# Altium PCB PCB.PcbDoc
Units mm, origin at the board's own origin, x right, y up, seen from the top; angles counter-clockwise.
Board outline 36.7 x 74.05 mm, 2 copper layers (Top Layer, Bottom Layer); 22 components, 23 nets, 97 pads, 0 vias.
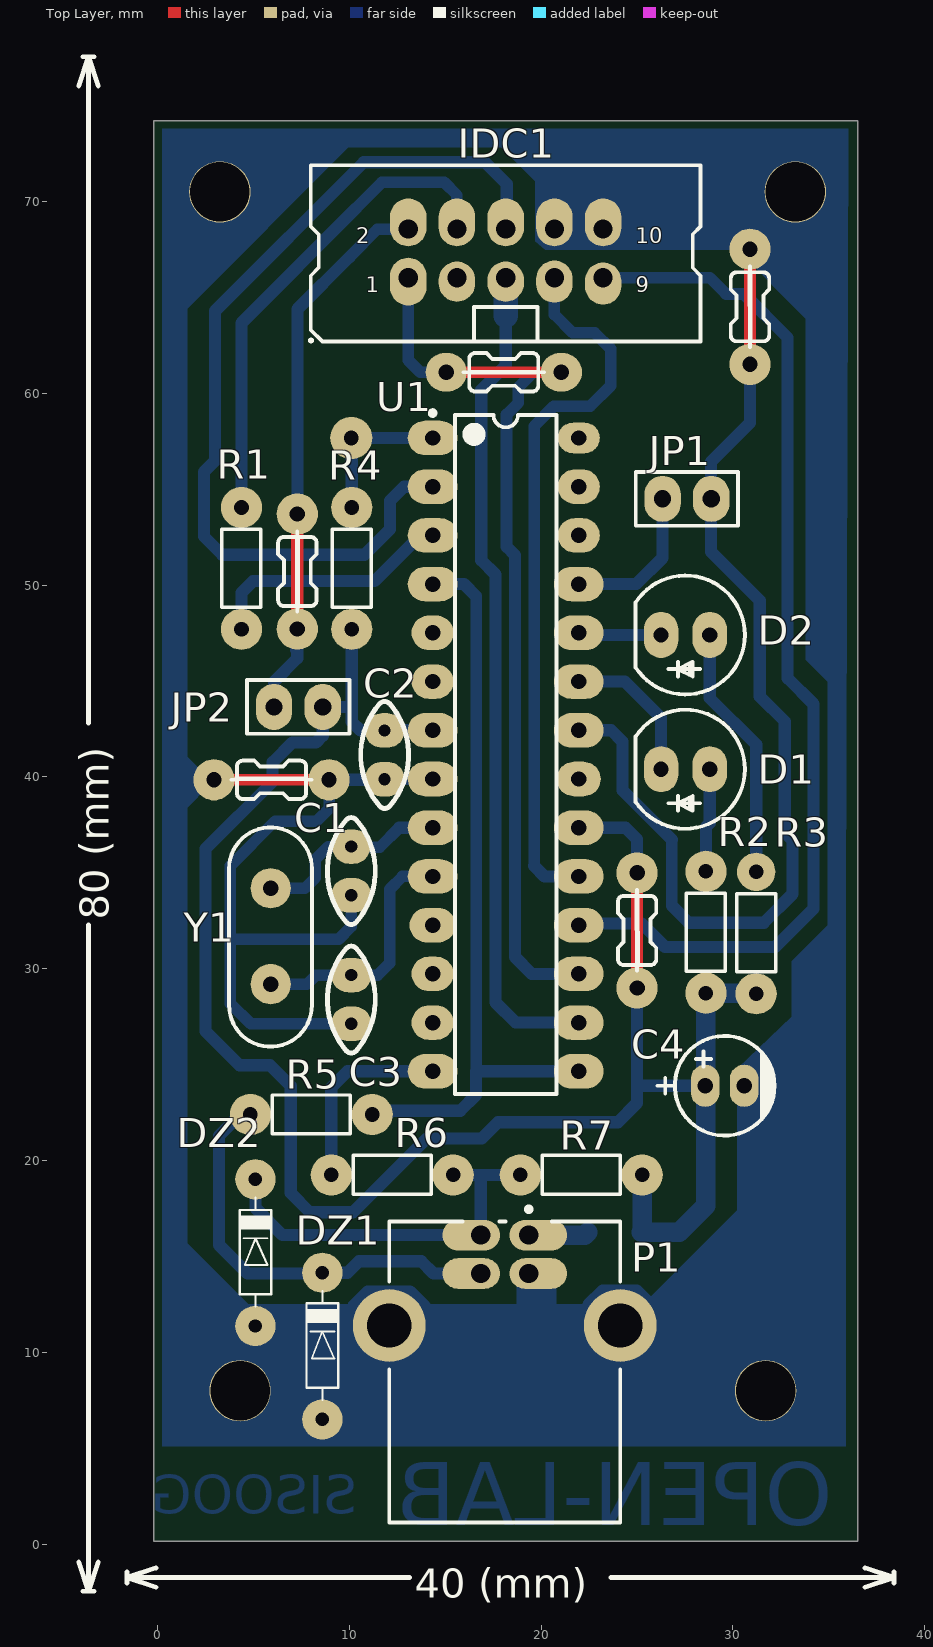
[diagram p0: Top Layer view]
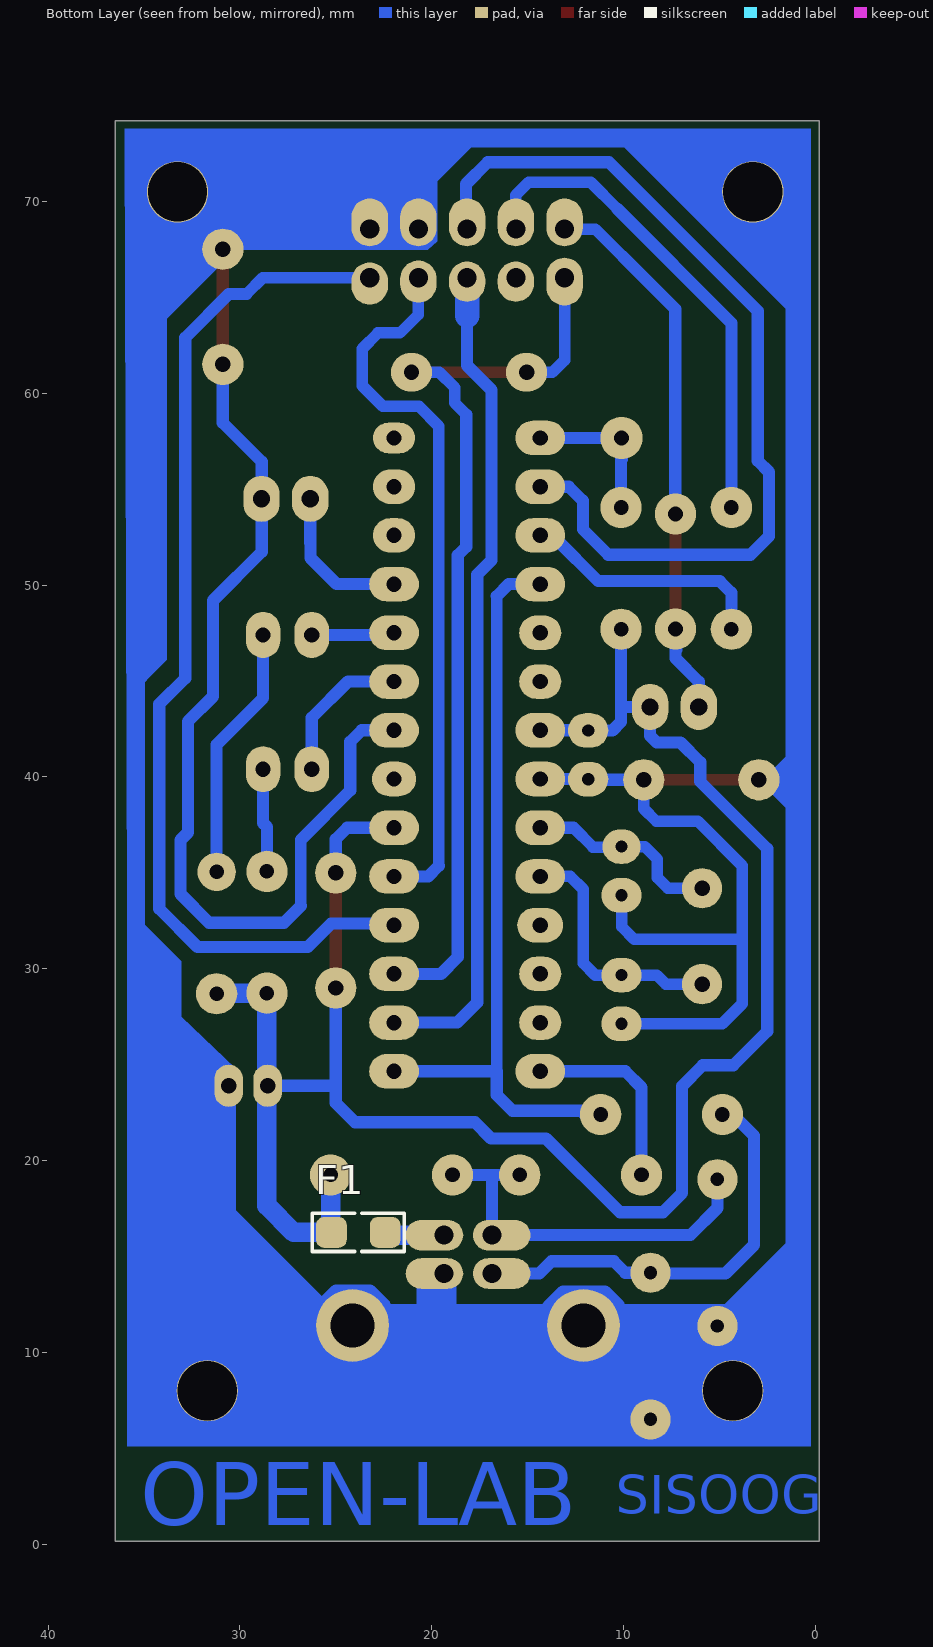
[diagram p1: Bottom Layer view, seen from below]
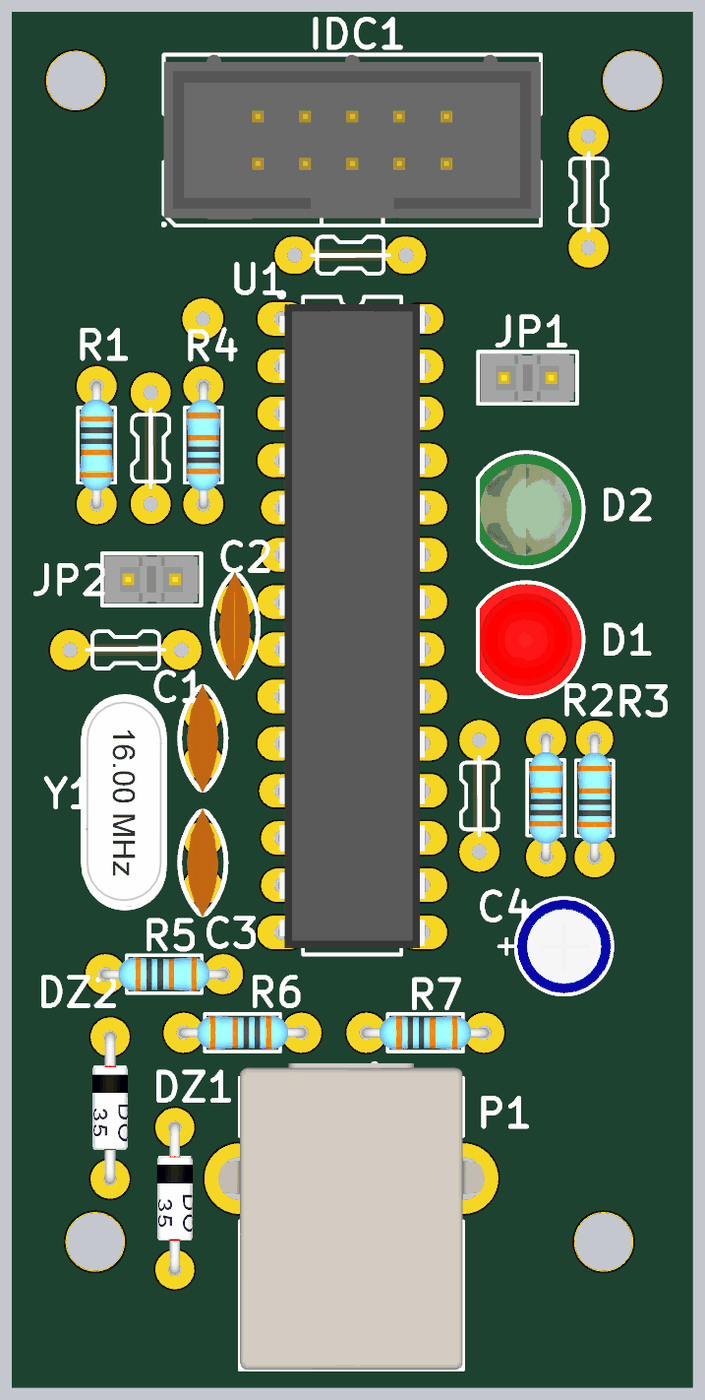
[diagram p2: 3D render of the assembled board from above, using the file's embedded part models]

## Layer stack, top to bottom
Top Solder: solder mask 0.0102, Solder Resist, Dk 3.5
Top Layer: signal copper 0.0356
Dielectric 1: dielectric 0.32, FR-4, Dk 4.8
Bottom Layer: signal copper 0.0356
Bottom Solder: solder mask 0.0102, Solder Resist, Dk 3.5

## Board outline
-0.2,0.15 36.5,0.15 36.5,74.2 -0.2,74.2

## Design rules (kind name [scope] priority, off if disabled: settings)
Clearance [All] p1: gap=0.35 ignorepadtopadclearanceinfootprint=FALSE
PolygonConnect [All] p1: connectstyle=Relief reliefconductorwidth=0.254 reliefentries=4 polygonreliefangle="90 Angle" airgapwidth=0.254
RoutingVias [All] p1: holewidth=0.711 width=1.27 viastyle="Through Hole" minholewidth=0.711 minwidth=1.27 maxholewidth=0.711 maxwidth=1.27
SolderMaskExpansion [All] p1: expansion=0.102
Width [All] p1: maxlimit=1.27 minlimit=0.6 preferedwidth=1.016 minimp=50.000000 maximp=50.000000 favimp=50.000000
30 further rules are at their usual default settings.

## Components (designator, comment, footprint, x,y, rotation, side; value= is the part's Value field where it differs from the comment)
C1 "22pF" "Cap - 100nF"#1 10.1,35.1 r270 top
C2 "100nF" "Cap - 100nF"#2 11.84,41.154 r270 top
C3 "22pF" "Cap - 100nF"#2 10.1,28.4 r270 top
C4 "100uF/16V" C_EL_5X7 29.566,23.901 r0 top
D1 "LED5MM_RED" LED5MM_RED 27.52,40.404 r180 top
D2 "LED5MM_GRN" LED5MM_GRN 27.52,47.404 r180 top
DZ1 "3V6" "DO 35" 8.59,10.329 r270 top
DZ2 "3V6" "DO 35" 5.1,15.2 r270 top
F1 "FUSE1.5A_1206" F1206 23.825,16.256 r0 bottom
IDC1 "CONNECTOR_IDC_5X2" IDC2.54-10PIN 18.15,67.295 r0 top
JP1 "Jumper" "Jumper Small - 2.54 - GRAY" 27.6,54.5 r180 top
JP2 "Jumper" "Jumper Small - 2.54 - GRAY" 7.34,43.654 r180 top
P1 "USB Connector" USB2.5-2H4E 19.352,16.114 r270 top
R1 "1K" Res-(1/4)#1 4.374,50.876 r270 top
R2 "1K" Res-(1/4)#1 28.59,31.904 r90 top
R3 "1K" Res-(1/4)#2 31.209,31.876 r90 top
R4 "10K" Res-(1/4)#1 10.124,50.876 r90 top
R5 "68" Res-(1/4)#1 8.015,22.404 r0 top
R6 "68" Res-(1/4)#1 12.235,19.252 r180 top
R7 "2K2" Res-(1/4)#1 22.09,19.252 r0 top
U1 "ATmega8A-PU" 28P3 18.15,41.164 r0 top
Y1 "12 MHz" "XTAL 16MHZ" 5.9,31.7 r270 top

## Footprints (in the part's own frame and the unit in brackets; to place one, negate y for a bottom-side part, rotate by r counter-clockwise, add the part's x,y. Pads: shape width x height; smd on the part's side, far side on the other; paste and mask are expansions set on the pad)
28P3 [mm] "DIP, 28-Leads, Row Spacing 7.62mm, Pitch 2.54mm, Body 34.67x7.3mm"
  oval 2.6x1.8 hole 0.8: 1(-3.81,16.51) 2(-3.81,13.97) 3(-3.81,11.43) 4(-3.81,8.89) 7(-3.81,1.27) 8(-3.81,-1.27) 9(-3.81,-3.81) 10(-3.81,-6.35) 14(-3.81,-16.51) 15(3.81,-16.51) 16(3.81,-13.97) 17(3.81,-11.43) 18(3.81,-8.89) 19(3.81,-6.35) 20(3.81,-3.81) 22(3.81,1.27) 23(3.81,3.81) 24(3.81,6.35) 25(3.81,8.89)
  oval 2.2x1.8 hole 0.8: 5(-3.81,6.35) 6(-3.81,3.81) 12(-3.81,-11.43) 13(-3.81,-13.97) 26(3.81,11.43) 27(3.81,13.97)
  oval 2.4x1.8 hole 0.8: 11(-3.81,-8.89)
  oval 2.3x1.8 hole 0.8: 21(3.81,-1.27)
  oval 2.2x1.6 hole 0.8: 28(3.81,16.51)
  silkscreen extent -3.93,-17.7 2.65,17.93, body extent -3.95,-17.35 3.95,17.3, height 5.04
C_EL_5X7 [mm] "Capacitor Electrolythic, D5.0X7.0H pitch: 2mm"
  oval 1.5x2.2 hole 0.8: 1(-1.016,0) 2(1.016,0)
  silkscreen extent -3.5,-2.6 2.6,2.6, body extent -2.53,-2.53 2.53,2.53, height 7.33
"Cap - 100nF"#1 [mm]
  oval 1.8x2 hole 0.635: 1(-1.27,0)
  oval 1.8x2.1 hole 0.635: 2(1.27,0)
  silkscreen extent -2.78,-1.25 2.79,1.25, body extent -2.92,-0.86 2.92,0.83, height 6.92
"Cap - 100nF"#2 [mm]
  oval 1.8x2.1 hole 0.635: 1(-1.27,0) 2(1.27,0)
  silkscreen extent -2.78,-1.25 2.79,1.25, body extent -2.92,-0.86 2.92,0.83, height 6.92
"DO 35" [mm] "Diode"
  round 2.1 hole 0.7: 1(3.825,0) 2(-3.825,0)
  silkscreen extent -2.88,-0.85 2.8,0.85, body extent -4.1,-0.96 4.08,0.96, height 2.46
F1206 [mm] "FUSE, 1206, 3.2x1.6mm"
  rrect50% 1.6x1.6 smd paste-2 mask+0.075: 1(-1.4,0) 2(1.4,0)
  Top Layer pour cut-out: -0.8,1 -0.8,-1 0.8,-1 0.8,1
  silkscreen extent -2.4,-1 2.4,1, body extent -1.6,-0.8 1.6,0.8, height 1
IDC2.54-10PIN [mm] "Connector; IDC, Low Profile Male Header, Thru-Hole; 10 Position; Vertical; Pitch 2.54 mm; 20.32 x 9.2 x 9.45 mm (LxWxH) DESIGNER : ABBAS BASEREH"
  oval 1.9x2.5 hole 1 copper offset 0,-0.2: 1(-5.08,-1.27)
  oval 1.9x2.5 hole 1 copper offset 0,0.35: 2(-5.08,1.27) 4(-2.54,1.27) 6(0,1.27) 8(2.54,1.27) 10(5.08,1.27)
  oval 1.9x2.1 hole 1 copper offset 0,-0.2: 3(-2.54,-1.27) 5(0,-1.27)
  oval 1.9x2.2 hole 1 copper offset 0,-0.2: 7(2.54,-1.27)
  oval 1.9x2.2 hole 1 copper offset 0,-0.3: 9(5.08,-1.27)
  silkscreen extent -10.16,-4.6 10.16,4.6, body extent -10.15,-4.25 10.15,4.6, height 9.17
"Jumper Small - 2.54 - GRAY" [mm]
  oval 1.9x2.4 hole 0.9: 1(-1.27,0) 2(1.27,0)
  silkscreen extent -2.67,-1.4 2.67,1.4, body extent -2.54,-1.27 2.54,1.27, height 8.57
LED5MM_GRN [mm] "LED THD 5MM GREEN"
  oval 1.8x2.4 hole 0.8: 1(-1.27,0) 2(1.27,0)
  silkscreen extent -3.1,-3.1 2.6,3.1, body extent -3,-3 2.5,3, height 9.14
LED5MM_RED [mm] "LED THD 5MM RED"
  oval 1.8x2.4 hole 0.8: 1(-1.27,0) 2(1.27,0)
  silkscreen extent -3.1,-3.1 2.6,3.1, body extent -3,-3 2.5,3, height 9.14
Res-(1/4)#1 [mm]
  round 2.15 hole 0.762: 1(-3.175,0) 2(3.175,0)
  silkscreen extent -2.03,-1.02 2.03,1.02, body extent -3.43,-0.93 3.43,0.91, height 2.92
Res-(1/4)#2 [mm]
  round 2.15 hole 0.762: 1(-3.175,0)
  round 2 hole 0.762: 2(3.175,0)
  silkscreen extent -2.03,-1.02 2.03,1.02, body extent -3.43,-0.93 3.43,0.91, height 2.92
USB2.5-2H4E [mm] "Connector; USB1.1, Type B, Thru-Hole; 4 Position; Right Angle"
  oval 1.6x3 hole 1 copper offset 0,0.5: 1(0,0) 4(2,0)
  oval 1.6x3 hole 1 copper offset 0,-0.5 paste+2: 2(0,-2.5)
  oval 1.6x3 hole 1 copper offset 0,-0.5: 3(2,-2.5)
  round 3.8 hole 2.3: 4(4.71,4.77) 4(4.71,-7.27)
  silkscreen extent -1.47,-7.27 14.99,4.77, body extent -1.5,-8.7 15,6.2, height 10.95
"XTAL 16MHZ" [mm] "Crystal Oscillator"
  round 2.1 hole 0.8: 1(-2.5,0) 2(2.5,0)
  silkscreen extent -5.67,-2.18 5.76,2.15, body extent -5.68,-2.38 5.67,2.27, height 0.99

## Part data
C1 C2 C3: library part Cap-Bipolar, "Bipolar Capacitor", Voltage=100V, Adding Date=1387/12/20, Designer="Saeid Jorablo", Organazation=ControTec
C4: library part CAP_THD_EL, "CAP, THD, ELEC,", =http://www.chila.ir, ASSEMBLY=ASSEMBLY, DESC=DESCRIPTION, DIST#=MOUSER, MANF=MANF, MANF_P#=MANF_PART#, PARAM=20%, PARAM2=25V, PRICE="10= 5$"
D1: library part LED_THD_5MM_RED, "LED, THD, 5MM, RED", =http://www.chila.ir, ASSEMBLY=ASSEMBLY, DESC=DESCRIPTION, MANF=MANF, MANF_P#=MANF_PART#, PARAM2=2.2V, PRICE=PRICE
D2: library part LED_THD_5MM_GRN, "LED, THD, 5MM, GREEN", =http://www.chila.ir, ASSEMBLY=ASSEMBLY, DESC=DESCRIPTION, MANF=MANF, MANF_P#=MANF_PART#, PARAM2=2.2V, PRICE=PRICE
DZ1 DZ2: library part "ZENER GENERAL DIODE", "DIODE ZENER GENERAL", ComponentLink1Description="Manufacturer Link", ComponentLink2Description=Datasheet, PackageDescription="DIODE GEN ZENER", PackageReference="DO 35", PackageVersion=2017-1-12, Published=2017-1-12, Publisher="Abbas Basereh"
F1: library part FUSE_3A_1206_SLOW, "Fuse, 3A, 32VDC, 1206, SMD, Slow Blow", =http://www.chila.ir, MANF=Bourns, MANF_P#=SF-1206SP300-2, PARAM="3A; 32VDC; Slow Blow", PARAM2=0.027Ohm, PRICE=0.9$
IDC1: library part "IDC 5X2", "IDC, 5-Pin, Dual row", Manufacturer=CHINA, Max Current=mA, Category=Connector, ComponentLink1Description=Datasheet, ComponentLink2Description=Reference, Connector type="IDC5X2  PROGPIN", Designer="ABBAS BASEREH", LatestRevisionDate=1395-11-17, Mounting Technology=Through-Hole, Pin Count=10, Publisher="ABBAS BASEREH", Status=Unreleased, Update=2017-2-4
P1: library part "USB B-Type", "USB Connector-B Type", Adding Date=10/26/2010
R1 R2 R3 R4 R5 R6 R7: library part Resistor, "Resistor"
U1: "8-bit AVR Microcontroller, 8KB Flash, 512 Bytes EEPROM, 1KB SRAM, 28-pin PDIP, Industrial Grade (-40°C to 85°C)", Supplier Part Number 1=ATMEGA8A-PU-ND, ComponentLink1Description="Manufacturer Link", ComponentLink1URL=http://www.atmel.com/products/avr/default.asp?, ComponentLink2Description="ATmega8A Datasheet", ComponentLink2URL=http://www.atmel.com/dyn/resources/prod_documents/doc8159.pdf, ComponentLink3Description="ATmega8A Summary", ComponentLink3URL=http://www.atmel.com/dyn/resources/prod_documents/8159S.pdf, ComponentLink4Description="Atmel.com Home", ComponentLink4URL=http://www.atmel.com, DatasheetVersion=2017-1-5, PackageDescription="28-lead (0.300\"/7.62mm Wide) Plastic Dual Inline Package (PDIP)", PackageReference=28P3, PackageVersion=2017-1-5, Published=2017-1-5, Publisher="Abbas Basereh", Supplier 1=Digi-Key, Supplier 2=Farnell, Supplier 3=Mouser, Supplier Part Number 2=1748534, Supplier Part Number 3=556-ATMEGA8A-PU
Y1: library part XTAL, "XTAL Crystal", ComponentLink1Description=Datasheet, ComponentLink2Description=Reference, Design Date=2017-1-3, Designer="ABBAS BASEREH", Mounting Technology="Surface Mount\Through-Hole", Status=Unreleased
JP1 JP2: Company=E.P.I.L, Defualt State=Close, Design Date=2011/11/02

## Free pads (board coordinates)
  round 2.15 hole 0.8: 1(7.286,47.713) 1(8.942,39.853) 1(25,29) 1(30.886,61.513) 2(2.942,39.853) 2(7.286,53.713) 2(25,35) 2(30.886,67.513)
  oval 2.15x2 hole 0.8: 1(15.05,61.1) 2(21.05,61.1)
  round 2.2 hole 0.762: 6(10.1,57.674)
  round 3.2 hole 3.1: D(3.25,70.5) D(4.3,8) D(31.7,8) D(33.25,70.5)

## Nets (pads, with @x,y where several pads share a name; then routed paths per layer and width w, separated by ;. In a path a pad name is that pad's centre, name@x,y a point inside that pad or via, vN(x,y) a via of type N, cw(c..) or ccw(c..) an arc to the next point about the centre after c; other vN are vias at no path point)
GND: C1.2 C2.2 C3.2 C4.2 DZ1.1 DZ2.1 IDC1.8 IDC1.10 JP1.1 P1.4 pad.1@8.942,39.853 pad.1@30.886,61.513 pad.2@2.942,39.853 pad.2@30.886,67.513 pad.D U1.8 U1.22 | length 227.7
  Top Layer w0.6: pad.2@2.942,39.853 pad.1@8.942,39.853
  Top Layer w0.635: pad.1@30.886,61.513 pad.2@30.886,67.513
  Bottom Layer w0.6: pad.1@8.942,39.853 8.942,38.342 8.3,37.7 6.128,37.7 3.8,35.372 3.8,31.547 ; C1.2 10.1,32.2 9.447,31.547 3.8,31.547 ; C3.2@10.592,27.127 4.851,27.127 3.8,28.179 3.8,31.547 ; 26.814,33.286 26.814,36.727
  Bottom Layer w0.635: 1.16,39.725 1.09,39.654 ; 5.84,8.579 DZ2.1@5.84,11.404 ; 7.111,71.004 1.09,64.983 1.09,39.654 ; DZ1.1 8.59,11.404 ; pad.1@8.942,39.853 11.808,39.853 C2.2 11.85,39.894 U1.8 ; 10.228,12.445 10.958,13.174 13.156,13.174 13.937,12.394 ; P1.4@12.3,11.404 8.59,11.404 ; U1.8@14.34,39.572 U1.8@14.394,39.572 ; U1.22 23.648,42.434 24.24,41.842 24.24,39.302 26.814,36.727 ; 22.471,12.496 23.208,13.232 24.986,13.232 26.357,11.861 26.357,11.404 ; 23.5,70.606 23.59,70.696 ; 23.898,71.004 23.59,70.696 ; P1.4@24.34,11.404 26.357,11.404 ; 26.814,33.286 27.696,32.404 31.61,32.404 33.1,33.894 33.1,36.712 32.7,37.112 32.7,42.9 31.4,44.2 31.4,49.2 28.86,51.74 28.86,56.439 30.886,58.465 pad.1@30.886,61.513 ; 28.821,68.523 26.648,70.696 23.59,70.696 ; C4.2@30.34,23.904 30.84,23.404 30.84,13.654 28.59,11.404 26.357,11.404 ; 1.09,39.654 1.09,15.154 4.84,11.404 DZ2.1@5.84,11.404 ; DZ2.1@5.84,11.404 8.59,11.404
  Bottom Layer w1.27: P1.4@12.3,11.404 19.59,11.404 ; 20.16,12.216 20.16,13.306 19.352,14.114 19.352,11.642 19.59,11.404 ; P1.4@24.34,11.404 19.59,11.404
MISO: IDC1.9 U1.18 | length 55
  Bottom Layer w0.6: IDC1.9 28.8,66.025 29.65,65.175
  Bottom Layer w0.635: U1.18@21.973,32.361 25.239,32.361 26.46,31.14 32.207,31.14 34.2,33.133 34.2,43.8 32.85,45.15 32.85,62.9 30.575,65.175 29.65,65.175 ; U1.18@22.014,31.952 U1.18@22.148,32.086
MOSI: IDC1.1 pad.1@15.05,61.1 pad.2@21.05,61.1 U1.17 | length 48.9
  Top Layer w0.6: pad.1@15.05,61.1 pad.2@21.05,61.1
  Bottom Layer w0.6: IDC1.1 13.07,61.73 13.7,61.1 pad.1@15.05,61.1 ; 18.2,58.9 18.8,59.5 18.8,60.3 19.6,61.1 pad.2@21.05,61.1
  Bottom Layer w0.635: 18.2,58.9 18.2,52 18.636,51.564 18.636,30.608 19.51,29.734 U1.17
NetD1_1: D1.1 R2.2 | length 5.4
  Bottom Layer w0.635: R2.2 28.59,37.4 28.79,37.6 D1.1
NetD1_2: D1.2 U1.23 | length 7.8
  Bottom Layer w0.635: U1.23 24.359,44.974 26.25,43.083 D1.2
NetD2_1: D2.1 R3.2 | length 13.4
  Bottom Layer w0.635: D2.1 28.79,44.11 31.209,41.691 R3.2
NetD2_2: D2.2 U1.24 | length 4.3
  Bottom Layer w0.635: U1.24 22.07,47.404 D2.2
NetDZ1_2: DZ1.2 P1.3 R5.1 | length 23
  Bottom Layer w0.635: R5.1 4.304,22.404 3.2,21.3 3.2,15.6 4.686,14.114 DZ1.2@8.63,14.114 ; DZ1.2@8.59,13.979 DZ1.2@8.724,14.114 ; DZ1.2 9.904,14.154 10.5,14.75 13.75,14.75 14.386,14.114 P1.3
  Bottom Layer w1.27: DZ1.2 DZ1.2@8.63,14.114 ; DZ1.2@8.63,14.114 DZ1.2@8.724,14.114
NetDZ2_2: DZ2.2 P1.2 R6.1 R7.1 | length 20.5
  Bottom Layer w0.635: DZ2.2 5.1,17.525 6.511,16.114 P1.2 16.852,19.104 17,19.252 ; R6.1 17,19.252 ; R7.1 17,19.252
NetF1_1: F1.1 P1.1 | length 3.1
  Bottom Layer w1.016: P1.1 22.283,16.114 F1.1
NetIDC1_4: IDC1.4 R1.1 | length 27.3
  Bottom Layer w0.6: 10.338,69.638 11.7,71 14.95,71 15.61,70.34 IDC1.4
  Bottom Layer w0.635: R1.1@4.374,53.765 R1.1 4.374,63.674 10.338,69.638 ; IDC1.4@15.664,68.198 IDC1.4@15.664,69.236
NetJP1_2: JP1.2 U1.25 | length 8
  Bottom Layer w0.635: U1.25 24.954,50.054 26.32,51.42 26.32,52.2 26.33,52.21 JP1.2
NetR4_2: pad.6 R4.2 U1.1 | length 11.8
  Bottom Layer w0.635: 10.09,56.565 10.1,56.575 pad.6 U1.1 ; pad.6@10.124,57.25 R4.2 10.134,54.061 pad.6@10.134,57.26
NetR5_2: R5.2 U1.4 U1.15 | length 39.6
  Bottom Layer w0.6: 16.604,24.654 16.604,49.427
  Bottom Layer w0.635: R5.2@11.515,21.904 12.211,22.6 15.786,22.6 16.604,23.418 16.604,24.654 U1.15 ; U1.4 15.977,50.054 16.604,49.427
NetR6_2: R6.2 U1.14 | length 10.2
  Bottom Layer w0.635: R6.2 9.06,23.81 9.904,24.654 U1.14
RX: IDC1.6 U1.2 | length 47.9
  Bottom Layer w0.635: U1.2@14.34,54.812 U1.2@14.394,54.812 ; U1.2 12.851,55.134 12.117,54.4 12.117,52.917 10.79,51.59 3.374,51.59 2.414,52.55 2.414,55.9 3,56.486 3,64.3 10.75,72.05 17.075,72.05 18.204,70.921 IDC1.6@18.204,68.588
SCK: IDC1.7 U1.19 | length 37.9
  Bottom Layer w0.6: 19.626,35.368 19.626,58.292 20.659,59.325 22.55,59.325 23.625,60.4 23.625,62.325 22.8,63.15 21.65,63.15 20.69,64.11 IDC1.7
  Bottom Layer w0.635: 19.626,35.368 20.18,34.814 U1.19 ; U1.19@21.96,34.492 U1.19@22.014,34.492
SS: IDC1.5 U1.16 | length 43.4
  Bottom Layer w0.635: 18.15,64.05 18.15,61.45 16.875,60.175 16.875,51.3 17.62,50.555 17.62,28.244 18.669,27.194 U1.16 ; U1.16@21.96,26.872 U1.16@22.014,26.872
  Bottom Layer w1.27: 18.15,64.05 IDC1.5
TX: R1.2 U1.3 | length 13.9
  Bottom Layer w0.635: R1.2@4.374,47.415 R1.2 4.374,49.609 4.975,50.21 11.31,50.21 13.539,52.439 U1.3@13.539,52.958 ; U1.3@13.505,52.272 U1.3@14.394,52.272
VCC: C2.1 C4.1 F1.2 JP2.1 pad.1@25,29 pad.2@25,35 R2.1 R3.1 R4.1 R7.2 U1.7 U1.20 | length 104
  Top Layer w0.635: pad.1@25,29 pad.2@25,35
  Bottom Layer w0.635: R4.1 10.124,43.7 ; U1.7 11.85,42.434 C2.1 10.576,42.424 10.124,42.876 10.124,43.7 ; U1.20 24.396,37.354 25,36.75 pad.2@25,35 ; pad.1@25,29 25,23 24,22 17.746,22 16.9,21.154 14.035,21.154 10.185,17.304 7.94,17.304 6.94,18.304 6.94,23.896 5.867,24.968 4.276,24.968 2.5,26.744 2.5,36.257 6,39.757 6,40.773 7.027,41.8 8.265,41.8 8.61,42.145 JP2.1 10.078,43.654 10.124,43.7 ; pad.2@25.103,35.166 pad.2@25.103,35.265 ; 25.217,23.9 C4.1@28.585,23.9
  Bottom Layer w1.016: F1.2 F1.2@25.265,16.256 ; R7.2@25.265,19.154 F1.2@25.265,16.256 ; R3.1 31.18,28.729 R2.1 28.59,17.654 27.192,16.256 F1.2@25.265,16.256
VCC-USB: IDC1.2 JP2.2 pad.1@7.286,47.713 pad.2@7.286,53.713 | length 29.5
  Top Layer w0.635: pad.1@7.286,47.713 pad.2@7.286,53.713
  Bottom Layer w0.6: 10.025,67.125 11.465,68.565 IDC1.2
  Bottom Layer w0.635: JP2.2 6.07,44.97 7.286,46.186 pad.1@7.286,47.713 ; 7.232,46.633 pad.1@7.232,47.662 ; pad.2@7.3,54 7.3,64.4 10.025,67.125
XTAL1: C1.1 U1.9 Y1.1 | length 10.1
  Bottom Layer w0.6: Y1.1@6.172,34.199 7.682,34.199 8.23,34.747 8.23,35.712 8.887,36.37 C1.1 ; C1.1@10.1,36.347 11.592,36.347 12.598,37.354
  Bottom Layer w0.635: 12.598,37.354 U1.9 ; U1.9@14.34,37.032 U1.9@14.394,37.032
XTAL2: C3.1 U1.10 Y1.2 | length 13
  Bottom Layer w0.6: Y1.2 7.787,29.199 8.255,29.667 11.467,29.667 12.1,30.3 12.1,34.147 12.767,34.814 U1.10
pads on no net: IDC1.3 U1.5 U1.6 U1.11 U1.12 U1.13 U1.21 U1.26 U1.27 U1.28

## Other copper
Bottom Layer:
  region net GND: 34.95,53 34.95,32.02 34.01,31.08 35.55,31.08 35.55,53
  region net GND: 35.869,33.202 33.063,30.396 33.063,27.495 30.213,24.787 30.213,17.419 25.317,12.522 4.722,12.522 1.541,15.703 1.541,38.404 2.649,39.512 2.649,39.937 1.541,41.045 1.541,64.416 9.95,72.825 17.925,72.825 19.702,71.048 19.702,67.926 20.209,67.475 30.213,67.475 33.8,63.888 33.8,46.1 35.87,44.017 35.87,5.104 0.246,5.104 0.246,73.8 36.003,73.8
  region net GND: 35,51.75 35.87,51.75 35.87,32.5 35,32.5
  text "SISOOG" at 10.4,1.6 h2
  text "OPEN-LAB" at 35.2,1 h3.3

## Silkscreen, mask and mechanical layers (free items; w line width, h text height)
Top Overlay:
  lines w0.2: 3.842,39.853 4.142,39.853 ; 7.286,48.613 7.3,48.913 ; 7.286,52.513 7.286,52.813 ; 7.742,39.853 8.042,39.853 ; 15.95,61.1 16.25,61.1 ; 19.85,61.1 20.15,61.1 ; 25,29.9 25,30.2 ; 25,33.8 25,34.1 ; 30.886,62.413 30.886,62.713 ; 30.886,66.313 30.886,66.613 ; 4.142,39.153 ccw(c4.442,39.153) 4.442,38.853 5.042,38.853 5.342,39.153 6.542,39.153 6.842,38.853 7.442,38.853 ccw(c7.442,39.153) 7.742,39.153 7.742,40.553 ccw(c7.442,40.553) 7.442,40.853 6.842,40.853 6.542,40.553 5.342,40.553 5.042,40.853 4.442,40.853 ccw(c4.442,40.553) 4.142,40.553 4.142,39.153 ; 6.286,49.213 ccw(c6.586,49.213) 6.586,48.913 7.986,48.913 ccw(c7.986,49.213) 8.286,49.213 8.286,49.813 7.986,50.113 7.986,51.313 8.286,51.613 8.286,52.213 ccw(c7.986,52.213) 7.986,52.513 6.586,52.513 ccw(c6.586,52.213) 6.286,52.213 6.286,51.613 6.586,51.313 6.586,50.113 6.286,49.813 6.286,49.213 ; 16.25,60.4 ccw(c16.55,60.4) 16.55,60.1 17.15,60.1 17.45,60.4 18.65,60.4 18.95,60.1 19.55,60.1 ccw(c19.55,60.4) 19.85,60.4 19.85,61.8 ccw(c19.55,61.8) 19.55,62.1 18.95,62.1 18.65,61.8 17.45,61.8 17.15,62.1 16.55,62.1 ccw(c16.55,61.8) 16.25,61.8 16.25,60.4 ; 24,30.5 ccw(c24.3,30.5) 24.3,30.2 25.7,30.2 ccw(c25.7,30.5) 26,30.5 26,31.1 25.7,31.4 25.7,32.6 26,32.9 26,33.5 ccw(c25.7,33.5) 25.7,33.8 24.3,33.8 ccw(c24.3,33.5) 24,33.5 24,32.9 24.3,32.6 24.3,31.4 24,31.1 24,30.5 ; 29.886,63.013 ccw(c30.186,63.013) 30.186,62.713 31.586,62.713 ccw(c31.586,63.013) 31.886,63.013 31.886,63.613 31.586,63.913 31.586,65.113 31.886,65.413 31.886,66.013 ccw(c31.586,66.013) 31.586,66.313 30.186,66.313 ccw(c30.186,66.013) 29.886,66.013 29.886,65.413 30.186,65.113 30.186,63.913 29.886,63.613 29.886,63.013
  lines w0.254: -4.108,-0.927 -3.6,-2.451 ; -4.108,76.025 -3.6,77.549 ; -3.9,-2.451 -3.3,-2.451 ; -3.9,77.549 -3.3,77.549 ; -3.6,32.297 -3.6,-2.451 ; -3.6,42.8 -3.6,77.549 ; -3.092,-0.927 -3.6,-2.451 ; -3.092,76.025 -3.6,77.549 ; -1.603,-2.038 -1.603,-1.438 ; -0.079,-2.246 -1.603,-1.738 ; -0.079,-1.23 -1.603,-1.738 ; 4.113,39.9 7.713,39.914 ; 7.286,52.513 7.3,48.913 ; 13.146,-1.738 -1.603,-1.738 ; 16.287,61.086 19.887,61.1 ; 23.649,-1.738 38.397,-1.738 ; 25,33.787 25.014,30.187 ; 30.886,66.313 30.9,62.713 ; 36.873,-2.246 38.397,-1.738 ; 36.873,-1.23 38.397,-1.738 ; 38.397,-2.038 38.397,-1.438
  text "80 (mm)" at -2.538,32.551 h1.52 r90
  text "40 (mm)" at 13.4,-2.8 h1.52
Mechanical 1:
  the board outline again, w0.4

## Text inside footprints (layer, text, board x,y; h text height)
IDC1: Top Overlay "9" at 24.938,65.275 h0.8; Top Overlay "10" at 24.938,67.815 h0.8; Top Overlay "1" at 10.862,65.275 h0.8; Top Overlay "2" at 10.362,67.815 h0.8